# Altium PCB FPGA_board.PcbDoc (part 2 of 7)
Units mm, origin at the board's own origin, x right, y up, seen from the top; angles counter-clockwise.
Board outline 120 x 95 mm, 2 copper layers (Top Layer, Bottom Layer); 242 components, 219 nets, 1224 pads, 430 vias.
Unrouted connection lines stored in the file: 9.
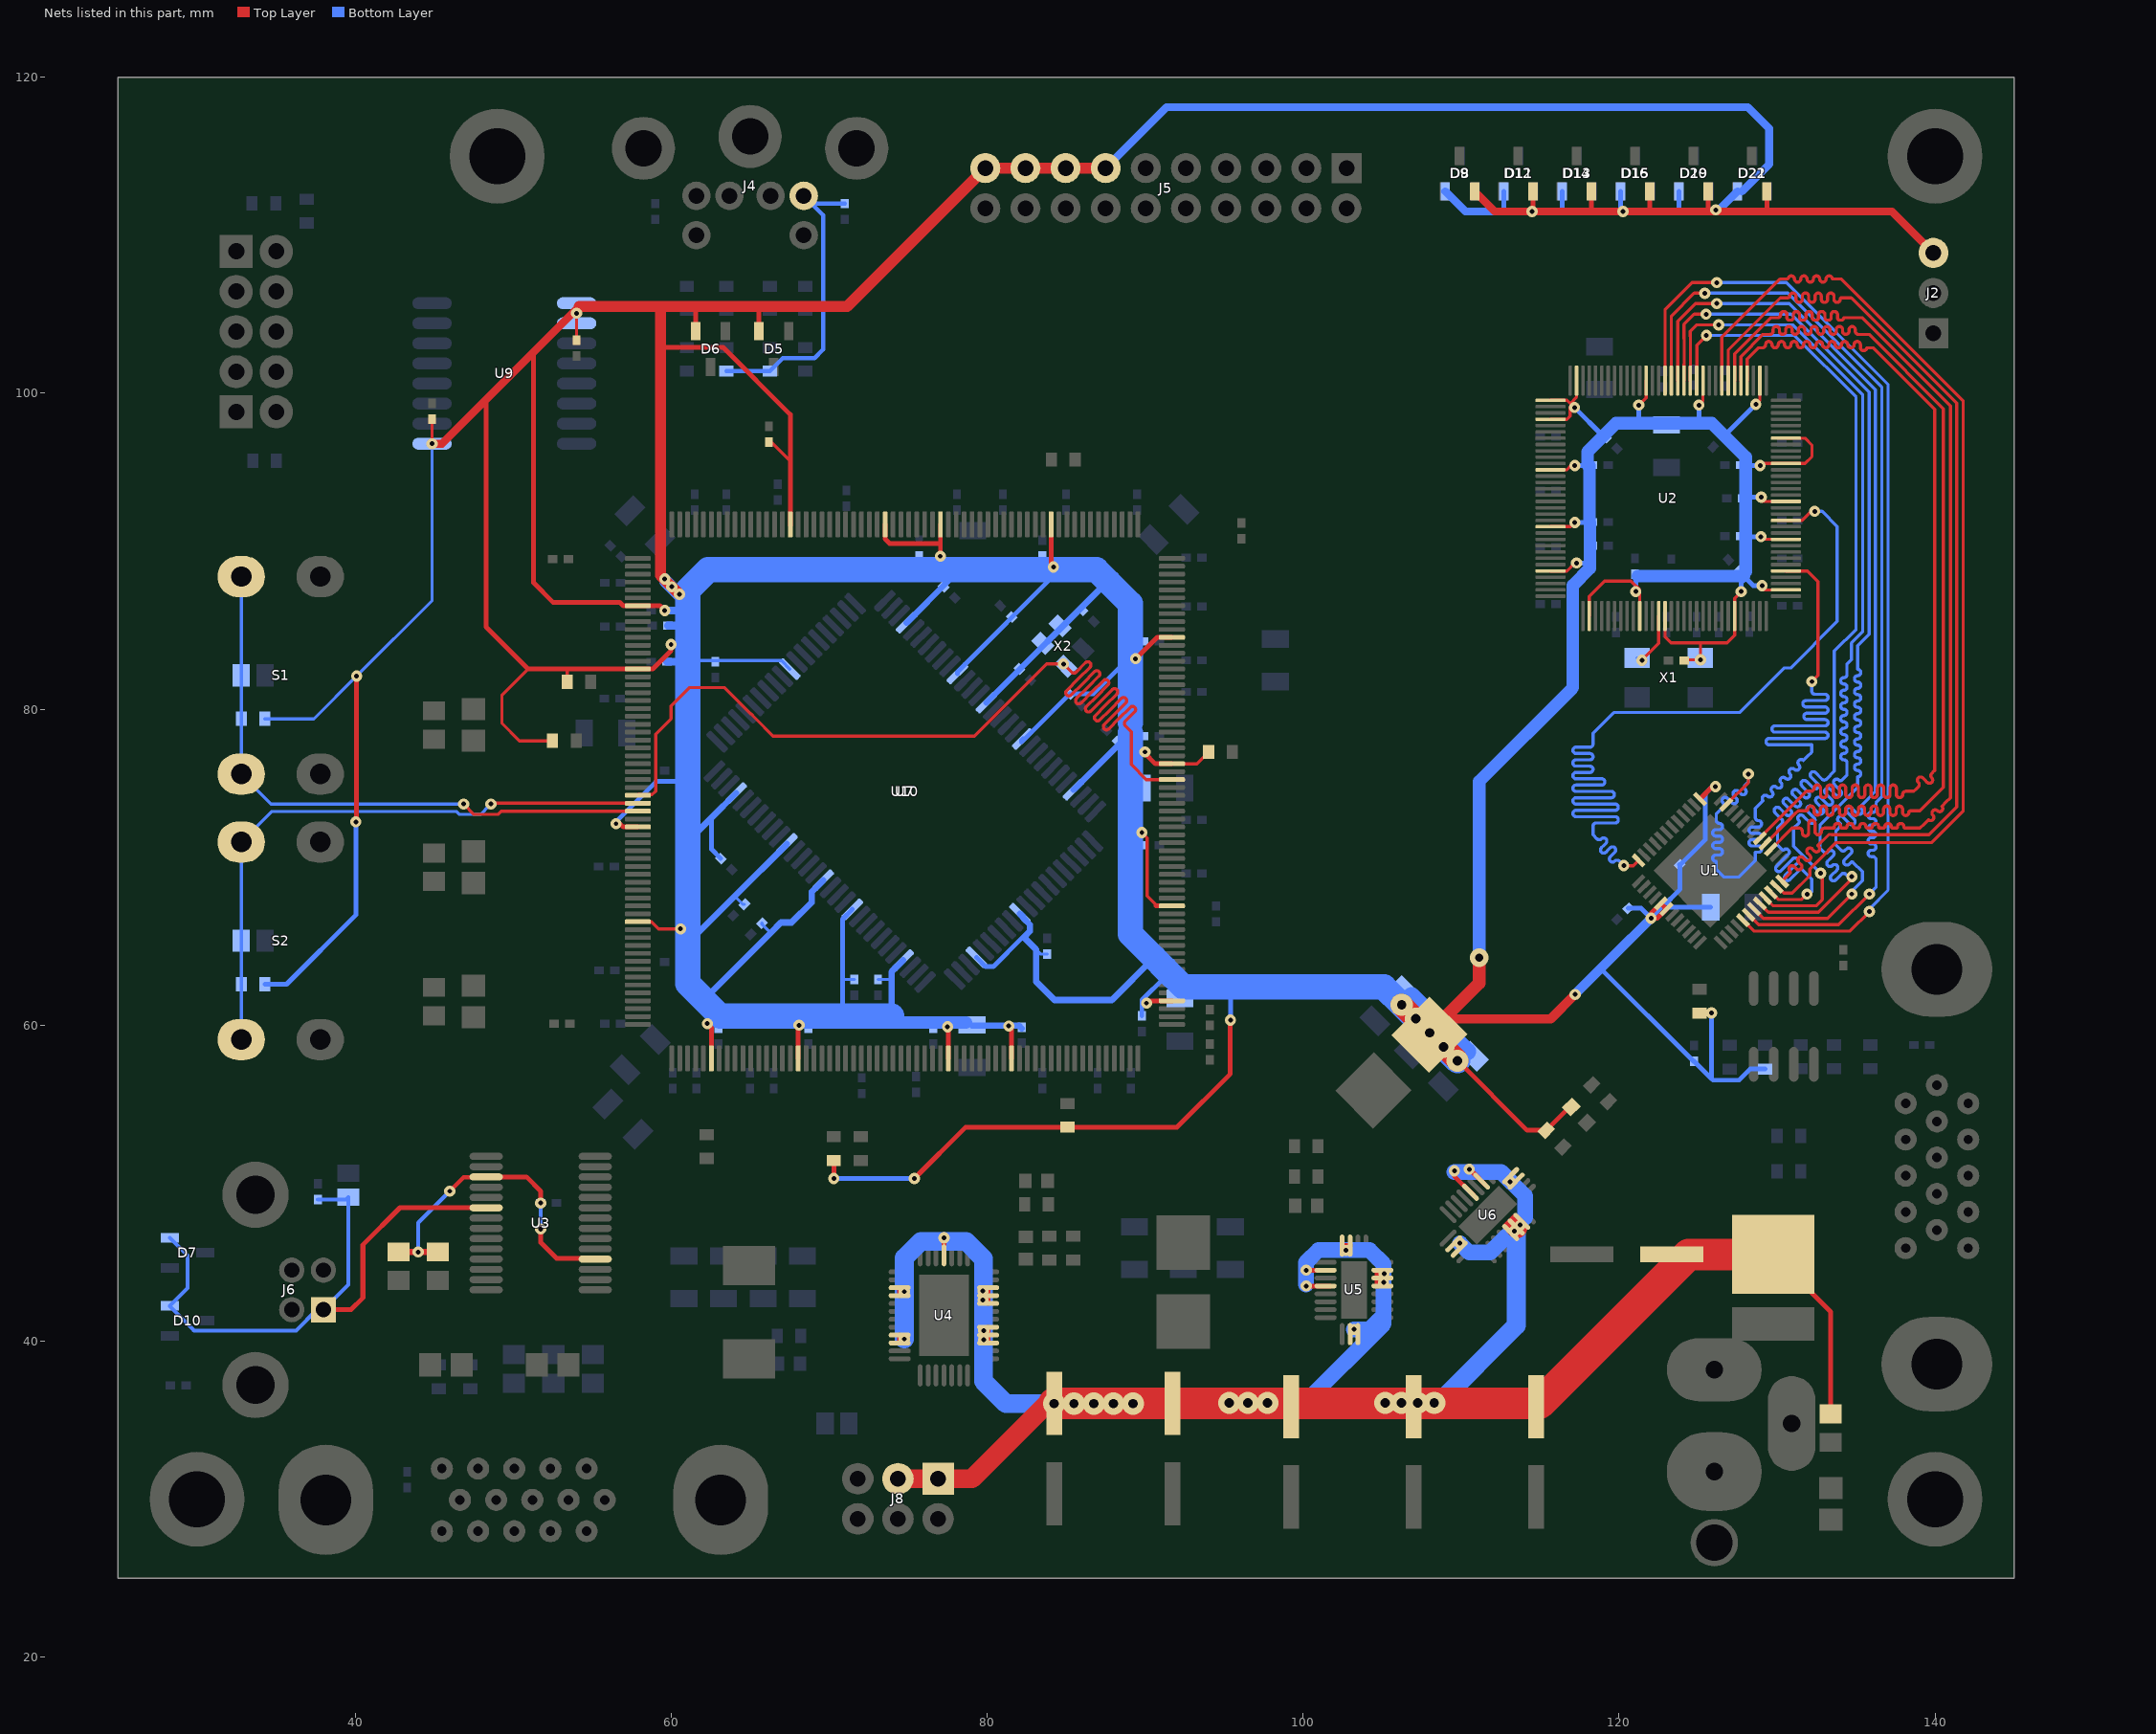
[diagram p2: the nets of this part, all layers, seen from the top]

## Via types
v1: diameter 0.71, hole 0.3, Top Layer to Bottom Layer, 393 vias
v2: diameter 1.4, hole 0.6, Top Layer to Bottom Layer, 32 vias
v3: diameter 2, hole 0.9, Top Layer to Bottom Layer, 4 vias
v4: diameter 1.2, hole 0.5, Top Layer to Bottom Layer, 1 vias

## Nets (pads, with @x,y where several pads share a name; then routed paths per layer and width w, separated by ;. In a path a pad name is that pad's centre, name@x,y a point inside that pad or via, vN(x,y) a via of type N, cw(c..) or ccw(c..) an arc to the next point about the centre after c; other vN are vias at no path point) (continued)
3.3V: C1.1 C2.2 C3.2 C6.2 C7.1 C8.1 C11.1 C12.1 C13.1 C14.1 C15.1 C16.1 C17.1 C18.1 C19.1 C20.1 C21.1 C65.1 C66.1 C67.1 C68.2 C69.2 C70.2 C71.2 C72.1 C73.1 C74.1 C75.1 C76.1 C77.1 C78.1 C79.1 C80.1 C81.1 C82.1 C83.1 C84.1 C85.1 C88.1 C94.1 C98.1 C102.1 C106.1 C107.1 C108.1 C111.1 C114.1 C117.1 C120.1 C123.1 C126.1 C129.1 C132.1 C135.1 C137.1 C139.1 D5.2 D6.2 D8.2 D9.2 D11.2 D12.2 D13.2 D14.2 D15.2 D16.2 D19.2 D20.2 D21.2 D22.2 J2.3 J5.7 J5.8 J5.9 J5.10 L3.2 R1.2 R7.1 R25.1 R26.1 R36.1 R41.1 R42.1 R43.1 R44.1 R45.1 U1.13 U1.29 U1.30 U2.4 U2.12 U2.16 U2.27 U2.34 U2.42 U2.48 U2.54 U2.58 U2.66 U2.75 U2.84 U2.95 U2.97 U2.100 U2.108 U2.117 U2.124 U7.7 U7.15 U7.35 U7.47 U7.66 U7.77 U7.96 U7.104 U7.124 U7.136 U7.154 U7.170 U7.192 U7.206 U7.213 U7.225 U9.1 U9.2 U9.9 U10.4 U10.11 U10.15 U10.20 U10.27 U10.41 U10.54 U10.61 U10.65 U10.70 U10.77 U10.91 U10.97 X1.4 X2.1 X2.4 | length 837.2
  Top Layer w0.2: v1@40.05,82.05 v1(40.1,82.1) ; v1(44.875,96.805) C70.2@44.875,98.35 ; 50.95,82.55 49.3,80.9 49.3,79.1 50.4,78 R43.1@52.5,78 ; R41.1@53.425,81.725 53.425,82.55 ; C71.2@54.025,103.35 v1(54.025,105.06) ; U7.47@57.9,66.55 58.755,66.55 59.205,66.1 v1(60.6,66.1) ; C132.1@66.2,96.9 66.225,96.925 66.325,96.925 67.55,95.7 ; v1(89.8,72.2) 90.137,71.863 90.137,68.188 90.704,67.621 90.704,67.55 ; U7.154@91.7,76.55 93.275,76.55 R42.1@94.025,77.3 ; U2.124@115.66,88.753 116.705,88.753 117.206,89.254 v1(117.31,89.254) ; U2.117@115.66,91.553 116.933,91.553 v1(117.203,91.823) ; U2.108@115.66,95.153 116.705,95.153 116.975,95.423 v1(117.203,95.423) ; U2.100@115.66,98.353 116.705,98.353 116.91,98.558 v1@116.91,99.099 ; U2.97@115.66,99.553 116.705,99.553 117.16,99.099 v1(117.178,99.099) ; 116.919,99.357 117.31,99.748 U2.95@117.31,100.803 ; U2.4@118.11,85.903 118.11,87.138 119.081,88.109 120.755,88.109 121.31,87.554 121.31,87.191 ; v1(121.053,87.448) 121.31,87.191 ; v1(121.253,99.249) 121.71,99.706 U2.84@121.71,100.803 ; U2.12@121.31,85.903 121.31,87.191 ; U2.16@122.91,85.903 122.91,84.59 123.288,84.212 125.162,84.212 ; C7.1@124.125,83.075 124.175,83.125 v1(125.15,83.125) 125.15,84.2 125.162,84.212 ; v1(125.053,99.249) 125.31,99.505 U2.75@125.31,100.803 ; v1(127.728,87.448) 127.31,87.03 U2.27@127.31,85.903 127.31,84.693 126.829,84.212 125.162,84.212 ; v1(128.655,99.298) 128.91,99.553 U2.66@128.91,100.803 ; v1(128.978,90.923) 129.148,90.753 U2.42@130.56,90.753 ; v1(129.003,93.423) 129.273,93.153 U2.48@130.56,93.153 v1@129.065,93.153 ; v1@129.065,87.553 U2.34@130.56,87.553 ; v1@129.065,95.553 U2.54@130.56,95.553 131.771,95.553 132.21,95.993 132.21,96.714 131.771,97.153 U2.58@130.56,97.153
  Top Layer w0.3: v1(40.05,72.875) 40.1,72.925 v1(40.1,82.1) ; 48.3,99.6 48.3,88.602 48.295,88.597 48.295,85.205 50.95,82.55 53.425,82.55 U7.15@57.95,82.55 ; 51.3,102.6 51.3,88 52.525,86.775 56.749,86.775 56.974,86.55 U7.7@57.9,86.55 59.297,86.55 v1(59.605,86.242) ; v1(56.52,72.755) 56.769,72.755 56.974,72.55 U7.35@57.9,72.55 ; U7.15@57.9,82.55 58.85,82.55 60,83.7 v1@60,84 ; 59.325,102.9 63.3,102.9 67.55,98.65 67.55,95.7 U7.225@67.55,91.625 ; 61.5,105.5 61.55,105.45 D6.2@61.55,103.925 ; v1(62.3,60.1) 62.55,59.85 U7.66@62.55,57.9 ; 63.4,105.5 63.45,105.45 ; D5.2@65.55,103.925 65.55,105.45 65.6,105.5 ; U7.77@68.05,57.9 68.05,59.95 v1(68.1,60) ; v1(70.3,50.3) R45.1@70.3,51.45 R45.1@70.45,51.45 ; U7.213@73.55,91.7 73.55,90.774 73.824,90.5 77.05,90.5 ; v1(75.4,50.3) 78.65,53.55 R44.1@85.1,53.55 92.025,53.55 95.4,56.925 95.4,60.323 v1(95.405,60.328) ; v1(77.043,89.685) 77.05,89.692 77.05,90.5 ; U7.206@77.05,91.7 77.05,90.5 ; v1(77.5,59.9) 77.55,59.95 U7.96@77.55,57.9 ; v1(81.375,59.953) 81.55,59.778 U7.104@81.55,57.9 ; U7.192@84.05,91.7 84.05,89.15 v1(84.2,89) ; v1(89.4,83.2) 89.424,83.2 90.774,84.55 U7.170@91.7,84.55 ; v1(90,77.3) 90,77.2 90.65,76.55 U7.154@91.7,76.55 ; v1@90.1,61.55 U7.124@91.7,61.55 ; 90.704,67.55 U7.136@91.7,67.55 ; v2(108.01,59.525) L3.2@108.885,60.4 ; v2@109.778,57.51 v2(109.778,57.758) 114.184,53.351 R36.1@115.387,53.351 116.863,54.828 C68.2@116.974,54.828 ; v1(114.5,111.5) 114.55,111.55 D12.2@114.55,112.775 ; 118.25,111.5 D14.2@118.25,112.775 ; D16.2@121.95,112.775 121.95,111.55 122,111.5 ; U1.13@125.121,74.318 v1@126.001,75.199 ; D20.2@125.65,112.775 125.65,111.6 ; 125.75,111.5 125.65,111.6 ; v1(126.125,111.6) 125.65,111.6 ; 129.25,111.5 129.35,111.6 D22.2@129.35,112.775 ; v1(122.026,66.774) 122.026,67.087 U1.29@122.646,67.707 U1.30@123,67.353 122.42,66.774 v1(122.026,66.774)
  Top Layer w0.5: v1(44.875,96.805) 45.505,96.805 48.3,99.6 51.3,102.6 54.2,105.5 ; 63.4,105.5 63.45,105.5 ; L3.2@107.993,59.402 108.102,59.402 L3.2@109.1,60.4 ; v2(108.01,59.525) L3.2@108.2,59.715 ; D9.2@110.85,112.775 112.125,111.5 v1(114.5,111.5) 118.25,111.5 v1(120.25,111.5) 122,111.5 125.75,111.5 129.25,111.5 137.28,111.5 J2.3@139.9,108.88
  Top Layer w0.6: L3.2@109.1,60.4 115.675,60.4 v1(117.225,61.95)
  Top Layer w0.7: 54.2,105.5 59.325,105.5 ; v1@60.487,87.312 59.325,88.475 59.325,102.9 59.325,105.5 ; 63.4,105.5 61.5,105.5 59.325,105.5 ; 63.45,105.5 65.6,105.5 71.14,105.5 J5.10@79.89,114.25 J5.9@82.43,114.25 J5.8@84.97,114.25 J5.7@87.51,114.25
  Top Layer w0.8: L3.2@108.885,60.4 111.15,62.665 v4(111.15,64.275)
  Top Layer w1.4: v2(106.242,61.293) v2(107.126,60.409) v2(108.01,59.525) 108.063,59.472 108.118,59.418 v2(108.894,58.641) v2(109.778,57.758)
  Bottom Layer w0.2: R25.1@34.3,79.396 37.396,79.396 v1(40.1,82.1) 44.875,86.875 v1(44.875,96.805) ; U9.2@54.025,104.425 v1(54.025,105.06) U9.1@54.025,105.695 ; 60.4,83.075 61.05,83.075 66.985,83.075 U10.41@67.517,82.543 ; 64.032,68.168 64.546,67.654 C74.1@64.654,67.654 ; C84.1@65.754,66.454 65.754,66.387 66.3,65.84 ; 70.855,62.9 C83.1@71.6,62.9 ; C75.1@73.1,62.9 73.95,62.9 ; 83.1,64.8 83.4,64.5 C76.1@83.8,64.5 ; U10.77@85.477,74.906 U10.77@85.477,75.033 ; v1(117.178,99.099) v1@117.254,99.099 ; 119.589,64.336 119.664,64.336 ; v1(125.15,83.125) X1.4@125.15,83.25 X1.4@125.15,83.57 ; v1@125.795,60.83 v1(125.85,60.775) ; v1(128.978,90.923) v1@128.978,91.187
  Bottom Layer w0.3: R26.1@34.3,62.596 35.671,62.596 40.05,66.975 v1(40.05,72.875) ; v1(56.52,72.755) 56.45,72.825 59.055,75.43 61.025,75.43 ; C123.1@59.5,86.2 59.563,86.2 v1(59.605,86.242) ; 60.6,64.85 60.713,64.85 ; 60.729,71.3 61.05,71.3 ; 62.556,73.128 62.556,71.144 C85.1@63.146,70.554 ; v1(70.3,50.3) v1(75.4,50.3) ; 70.85,60.925 71.2,60.575 ; 70.855,60.875 70.855,62.9 70.855,66.718 U10.11@71.477,67.34 ; v1(77.043,89.685) 77.043,89.657 v1@77.1,89.6 ; 77.6,88.171 77.6,88.825 ; U10.61@78.123,82.26 78.123,82.362 84.375,88.614 v1@84.375,88.825 ; U10.97@79.326,64.299 79.904,63.721 80.408,63.721 82.259,65.571 82.329,65.571 ; U10.70@82.304,78.123 U10.70@82.26,78.123 82.169,78.033 82.169,77.906 85.217,80.954 C78.1@85.246,80.954 85.246,80.985 86.735,80.985 v1@89.075,83.325 ; 87.578,88.038 87.712,88.038 ; 88.681,84.5 89.075,84.5 ; 89.075,77.3 v1(90,77.3) ; 89.075,78.504 89.075,79.15 ; C106.1@89.8,60.6 89.8,61.6 91.275,63.075 91.275,63.575 ; v1(95.405,60.328) 95.405,62.42 ; D11.2@112.7,112.775 112.7,111.55 112.75,111.5 ; 116.25,111.5 116.4,111.65 D13.2@116.4,112.775 ; v1(117.178,99.099) 118.972,97.304 C19.1@119.01,97.304 ; v1(117.203,91.823) 118.01,91.823 ; v1(117.203,95.423) 118.01,95.423 ; v1(117.225,61.95) v1@117.225,61.972 ; v1(117.31,89.254) 117.96,89.254 118.01,89.304 ; 118.841,63.589 124.705,57.725 C6.2@124.75,57.725 125.85,56.625 ; D15.2@120.1,112.775 120.1,111.65 v1(120.25,111.5) ; C2.2@120.579,67.404 121.396,67.404 v1(122.026,66.774) 122.728,67.475 ; v1(121.053,87.448) C13.1@121.053,88.429 ; 121.253,98.074 121.253,98.1 v1(121.253,99.249) ; 123.75,111.5 123.8,111.55 D19.2@123.8,112.775 ; 125.053,98.074 125.053,98.1 v1(125.053,99.249) ; C1.1@125.8,67.475 122.728,67.475 ; v1(125.85,60.775) 125.85,56.625 ; v1(126.1,75.1) 125.9,75.1 125.462,74.662 125.462,71.748 123.868,70.154 C3.2@123.829,70.154 123.86,70.122 123.86,68.608 122.728,67.475 ; v1(126.125,111.6) v1@126.225,111.5 ; 126.911,97.554 v1(128.655,99.298) ; D21.2@127.5,112.775 D21.2@127.775,112.775 ; v1(127.728,87.448) 127.728,88.023 127.975,88.269 C14.1@127.975,88.675 ; 127.889,88.425 128.491,87.823 v1(129.053,87.823) ; 128.01,90.923 v1(128.978,90.923) ; C16.1@128.01,93.423 v1(129.003,93.423) ; 128.01,95.423 v1(128.928,95.423) ; R7.1@129.25,57.225 128.295,57.225 127.595,56.525 125.95,56.525 125.85,56.625
  Bottom Layer w0.4: 60.713,64.85 61.05,65.187 64.032,68.168 U10.20@67.34,71.477 ; 60.729,71.3 61.05,71.621 61.564,72.136 62.556,73.128 ; 62.275,61.815 66.3,65.84 66.96,66.5 67.625,66.5 68.9,67.775 68.9,68.44 U10.15@69.638,69.178 ; 62.564,73.136 U10.27@64.123,74.694 ; 73.95,60.525 73.95,62.9 73.95,63.379 U10.4@74.694,64.123 ; U10.54@74.906,85.477 77.6,88.171 ; C107.1@79.05,59.975 82.025,59.975 C102.1@82.2,59.8 ; U10.65@79.962,80.421 87.578,88.038 ; U10.91@82.083,67.057 82.3,66.84 82.3,66.784 82.712,66.372 82.712,65.953 82.329,65.571 83.1,64.8 83.1,62.775 84.275,61.6 87.9,61.6 90.575,64.275 ; U10.77@85.477,74.906 89.075,78.504
  Bottom Layer w0.5: C126.1@59.75,83 60.975,83 61.05,83.075 ; C123.1@59.75,86.25 61.05,86.25 ; C88.1@59.8,85.3 61.025,85.3 61.05,85.325 ; J5.7@87.51,114.25 91.36,118.1 128.15,118.1 129.5,116.75 129.5,114.5 D21.2@127.775,112.775 ; D8.2@109,112.775 110.275,111.5 112.75,111.5 v1(114.5,111.5) 116.25,111.5 v1(120.25,111.5) 123.75,111.5 126.225,111.5 D21.2@127.5,112.775 ; 118.01,95.423 118.01,95.454 ; v1(125.053,99.249) v1@125.065,99.249
  Bottom Layer w0.6: v1@117.225,61.972 119.253,64 ; 118.841,63.589 119.589,64.336 v1(122.026,66.774)
  Bottom Layer w0.7: v1@60.6,87.075 59.6,88.075 v1(59.6,88.25) v1@60.6,87.25
  Bottom Layer w0.8: 74.075,60.175 C107.1@78.675,60.175 ; v4@111.15,64.05 111.15,75.436 117.009,81.295 117.009,81.309 117.075,81.375 117.075,87.85 118.15,88.925 118.15,89.55 ; 118.01,95.454 118.01,96.304 119.01,97.304 119.806,98.1 121.253,98.1 125.053,98.1 125.871,98.1 C18.1@126.663,97.308 128.01,95.961 128.01,95.423 128.01,93.423 128.01,90.923 128.01,88.71 C14.1@127.975,88.675 ; C20.1@118.135,91.823 C21.1@118.135,95.423 ; 118.16,89.304 C20.1@118.16,91.823 ; C13.1@121.2,88.425 127.889,88.425
  Bottom Layer w1.1: C66.1@106.861,61.876 C67.1@108.629,60.109 C65.1@110.397,58.341
  Bottom Layer w1.6: 71.146,60.575 63.125,60.575 61.05,62.65 61.05,65.187 61.05,71.3 61.05,71.621 61.05,83.075 61.05,85.325 61.05,86.25 61.05,87.525 62.35,88.825 77.6,88.825 84.375,88.825 86.925,88.825 87.712,88.038 89.075,86.675 89.075,84.5 89.075,83.325 89.075,79.15 ; 71.2,60.575 73.95,60.575 ; 89.075,78.504 89.075,77.3 89.075,65.775 90.575,64.275 91.275,63.575 92.43,62.42 95.405,62.42 105.115,62.42 v2(106.242,61.293) v2(107.126,60.409) v2(108.01,59.525) v2(109.778,57.758)
  other v1: 90.1,61.4 60,84.1 60.525,87.275 60.05,87.75
3.3V_USB: C46.1 R27.2 R28.2 U3.4 U3.17 | length 20.8
  Top Layer w0.254: v1(46,49.5) 46.875,50.375 48.275,50.375 U3.17@48.3,50.4
  Top Layer w0.3: U3.17@48.3,50.4 50.85,50.4 51.75,49.5 v1(51.75,48.75) ; v1(51.75,47.1) 51.75,46.25 52.75,45.25 55.15,45.25 U3.4@55.2,45.2
  Top Layer w0.4: R27.2@42.75,45.65 v1(44,45.65) R28.2@45.25,45.65
  Bottom Layer w0.254: v1(44,45.65) 44,47.5 v1(46,49.5) ; v1(51.75,47.1) v1(51.75,48.75)
5V: C39.2 J4.4 R14.2 R15.2 | length 18.9
  Bottom Layer w0.254: R15.2@63.5,101.4 R14.2@66.25,101.4 67.073,102.223 69.085,102.223 69.627,102.765 69.627,111.273 J4.4@68.9,112 ; J4.4@68.525,112.375 J4.4@68.9,112 ; C39.2@71,112 J4.4@68.9,112
5V_IN: C48.1 C49.1 C55.1 C56.1 C59.1 C64.1 D23.2 J8.1 J8.2 R30.1 U4.3 U4.4 U4.9 U4.10 U4.22 U4.23 U4.24 U4.27 U4.28 U4.29 U4.35 U5.2 U5.4 U5.10 U5.11 U5.17 U5.18 U5.19 U5.23 U5.24 U6.2 U6.4 U6.10 U6.11 U6.17 U6.18 U6.19 U6.23 U6.24 | length 174.8
  Top Layer w0.3: U4.10@74.471,39.891 U4.9@74.471,40.391 ; U4.4@74.471,42.891 U4.3@74.471,43.391 ; U4.35@77.271,45.441 77.271,46.546 v1(77.275,46.55) ; U4.22@80.071,39.891 U4.23@80.071,40.391 U4.24@80.071,40.891 ; U4.27@80.071,42.391 U4.28@80.071,42.891 U4.29@80.071,43.391 ; v1(100.2,43.5) U5.4@101.425,43.5 U5.4@101.725,43.5 ; v1(100.2,44.5) U5.2@101.425,44.5 ; U5.24@102.475,46.05 U5.23@102.975,46.05 ; v1(109.577,50.788) 109.577,50.443 U6.4@110.594,49.427 U6.4@110.806,49.214 ; v1@110.77,50.664 U6.2@111.513,49.921 ; D23.2@129.75,45.5 133.4,41.85 R30.1@133.4,35.4
  Top Layer w0.4: U5.17@104.725,43.55 U5.19@104.725,44.45 ; U6.17@112.821,47.27 U6.19@113.457,47.906
  Top Layer w1.2: J8.2@74.36,31.3 J8.1@76.9,31.3 79.05,31.3 83.806,36.056 v2(84.25,36.056) ; C48.1@114.75,35.85 C48.1@114.956,36.056
  Top Layer w1.3: U6.18@113.457,47.27 U6.18@113.546,47.181
  Top Layer w2: v2(85.5,36.056) v2(84.25,36.056) ; v2(86.75,36.056) v2(84.25,36.056) ; v2(88,36.056) v2(84.25,36.056) ; D23.2@129.75,45.5 124.4,45.5 114.956,36.056 C64.1@91.75,36.056 v2(89.25,36.056) v2(84.25,36.056)
  Bottom Layer w1: v2(95.325,36.1) 100.1,36.1 105.1,41.1 105.1,41.65 ; v1@100.2,43.6 100.2,45 100.975,45.775 104.2,45.775 105.1,44.875 105.1,41.65 ; v1(103.225,40.75) 104.2,40.75 105.1,41.65 ; v1@109.577,50.717 110.52,50.717 112.533,50.717 114.053,49.197 114.053,47.83 111.837,45.614 110.517,45.614 v1@109.939,46.192
  Bottom Layer w1.2: v1(74.771,40.141) v1(74.771,43.141) 74.771,45.271 75.825,46.325 78.675,46.325 79.771,45.229 79.771,43.175 v1@79.771,40.141 ; v1(79.778,40.099) 79.778,37.472 81.194,36.056 v2(84.25,36.056) v2(85.5,36.056) v2(86.75,36.056) v2(88,36.056) v2(89.25,36.056) ; v2(105.2,36.1) 108.6,36.1 113.5,41 v1@113.5,47
  other v1: 79.796,40.682 79.743,42.609 79.743,43.175 105.1,43.725 105.125,44.275 102.725,45.75 109.922,46.209 113.376,46.977 113.751,47.351 113.104,50.098 110.52,50.889
  other v2: 96.5,36.1 97.75,36.1 106.233,36.1 107.267,36.1 108.3,36.1
5V_USB: C44.1 C45.2 D7.2 D10.2 J6.1 U3.20 | length 40.9
  Top Layer w0.305: J6.1@38,42 39.75,42 40.5,42.75 40.5,46.1 42.85,48.45 U3.20@48.3,48.45
  Bottom Layer w0.254: D7.2@28.275,46.55 29.4,45.425 29.4,43.375 D10.2@28.275,42.25 28.275,42.213 29.815,40.673 36.267,40.673 37.594,42 J6.1@38,42 39.575,43.575 C45.2@39.575,49.125 39.425,48.975 C44.1@37.65,48.975
10MHZ: U2.15 X1.3 | length 3.6
  Top Layer w0.2: v1(121.45,83.1) 122.51,84.16 U2.15@122.51,85.903
  Bottom Layer w0.2: X1.3@121.15,83.25 121.3,83.1 v1(121.45,83.1)
50MHZ: U7.31 U7.152 X2.3 | length 71
  Top Layer w0.2: U7.31@57.9,74.55 57.95,74.6 58.805,74.6 59.025,74.82 59.025,78.425 60,79.4 60,80.2 61.175,81.375 63.376,81.375 65.032,79.719 65.049,79.719 65.316,79.452 65.316,79.435 66.451,78.3 79.2,78.3 83.769,82.869 v1(84.835,82.869) 85.354,82.35 ccw(c85.495,82.491) 85.637,82.35 86.233,82.946 cw(c86.375,82.805) 86.516,82.946 cw(c86.375,82.805) 86.516,82.663 85.778,81.926 85.041,81.188 ccw(c85.182,81.047) 85.041,80.905 ccw(c85.182,81.047) 85.323,80.905 86.061,81.643 86.799,82.381 cw(c86.94,82.239) 87.082,82.381 cw(c86.94,82.239) 87.082,82.098 86.344,81.36 85.664,80.68 ccw(c85.805,80.538) 85.664,80.397 ccw(c85.805,80.538) 85.947,80.397 86.627,81.077 87.364,81.815 cw(c87.506,81.673) 87.647,81.815 cw(c87.506,81.673) 87.647,81.532 86.91,80.794 86.285,80.17 ccw(c86.426,80.028) 86.285,79.887 ccw(c86.426,80.028) 86.568,79.887 87.192,80.512 87.93,81.249 cw(c88.072,81.108) 88.213,81.249 cw(c88.072,81.108) 88.213,80.966 87.475,80.229 86.851,79.604 ccw(c86.992,79.463) 86.851,79.321 ccw(c86.992,79.463) 87.134,79.321 87.758,79.946 88.496,80.684 cw(c88.637,80.542) 88.779,80.684 cw(c88.637,80.542) 88.779,80.401 88.041,79.663 87.416,79.038 ccw(c87.558,78.897) 87.416,78.756 ccw(c87.558,78.897) 87.699,78.756 88.324,79.38 89.061,80.118 cw(c89.203,79.976) 89.344,80.118 cw(c89.203,79.976) 89.344,79.835 88.748,79.239 ccw(c88.89,79.097) 88.748,78.956 89.127,78.577 89.127,78.377 ; 89.127,78.575 89.127,76.498 90.075,75.55 U7.152@91.7,75.55
BTN1: C42.2 R26.2 S2.2 U7.32 | length 38.9
  Top Layer w0.203: v1@48.5,73.9 48.65,74.05 U7.32@57.9,74.05
  Bottom Layer w0.203: S2.2@32.688,71.734 S2.2@32.8,71.846 ; S2.2@32.8,59.096 S2.2@32.8,71.596 34.736,73.532 46.415,73.532 46.603,73.344 47.944,73.344 v1@48.5,73.9
  other v1: 48.6,74
BTN2: C41.2 R25.2 S1.2 U7.33 | length 38.7
  Top Layer w0.203: v1(46.875,74) 47.532,73.344 49.043,73.344 49.25,73.55 U7.33@57.9,73.55
  Bottom Layer w0.203: S1.2@32.8,88.396 S1.2@32.8,75.896 34.696,74 v1(46.875,74)
FB_BLANK: U1.11 U2.37 | length 63.5
  Top Layer w0.2: U1.11@126.783,73.965 128.185,75.367 v1(128.185,75.9) ; U2.37@130.56,88.753 131.915,88.753 132.59,88.079 132.59,82.14 v1(132.2,81.75)
  Bottom Layer w0.2: v1(128.185,75.9) 128.185,75.41 127.988,75.212 ccw(c128.129,75.071) 127.988,74.93 cw(c127.846,74.788) 127.987,74.647 cw(c127.846,74.788) 127.705,74.647 127.563,74.788 127.552,74.8 ccw(c127.41,74.658) 127.269,74.8 ccw(c127.41,74.658) 127.269,74.517 127.28,74.505 127.422,74.364 cw(c127.28,74.223) 127.422,74.081 cw(c127.28,74.223) 127.139,74.081 126.998,74.223 126.856,74.364 ccw(c126.715,74.223) 126.573,74.364 ccw(c126.715,74.223) 126.573,74.081 cw(c126.432,73.94) 126.573,73.798 126.432,73.657 126.15,73.375 126.15,73.175 126.15,72.975 ccw(c126.35,72.975) 126.35,72.775 cw(c126.35,72.575) 126.55,72.575 cw(c126.35,72.575) 126.35,72.375 126.15,72.375 126.125,72.375 ccw(c126.125,72.175) 125.925,72.175 ccw(c126.125,72.175) 126.125,71.975 126.15,71.975 126.35,71.975 cw(c126.35,71.775) 126.55,71.775 cw(c126.35,71.775) 126.35,71.575 126.15,71.575 126.125,71.575 ccw(c126.125,71.375) 125.925,71.375 ccw(c126.125,71.375) 126.125,71.175 126.15,71.175 126.35,71.175 cw(c126.35,70.975) 126.55,70.975 cw(c126.35,70.975) 126.35,70.775 126.15,70.775 126.125,70.775 ccw(c126.125,70.575) 125.925,70.575 ccw(c126.125,70.575) 126.125,70.375 cw(c126.125,70.35) 126.15,70.35 126.15,70.275 126.15,69.875 126.65,69.375 127.575,69.375 128.625,70.425 128.625,70.925 cw(c128.65,70.925) 128.65,70.95 128.825,70.95 ccw(c128.825,71.15) 129.025,71.15 ccw(c128.825,71.15) 128.825,71.35 128.625,71.35 128.425,71.35 cw(c128.425,71.55) 128.225,71.55 cw(c128.425,71.55) 128.425,71.75 128.625,71.75 128.825,71.75 ccw(c128.825,71.95) 129.025,71.95 ccw(c128.825,71.95) 128.825,72.15 128.625,72.15 128.425,72.15 cw(c128.425,72.35) 128.225,72.35 cw(c128.425,72.35) 128.425,72.55 128.625,72.55 128.825,72.55 ccw(c128.825,72.75) 129.025,72.75 ccw(c128.825,72.75) 128.825,72.95 cw(c128.825,73.15) 128.625,73.15 128.625,73.725 128.975,74.075 129.116,74.216 cw(c129.258,74.358) 129.116,74.499 cw(c129.258,74.358) 129.399,74.499 ccw(c129.541,74.641) 129.682,74.499 ccw(c129.541,74.641) 129.682,74.782 cw(c129.824,74.924) 129.682,75.065 cw(c129.824,74.924) 129.965,75.065 ccw(c130.106,75.206) 130.248,75.065 ccw(c130.106,75.206) 130.248,75.348 cw(c130.389,75.489) 130.248,75.631 cw(c130.389,75.489) 130.531,75.631 ccw(c130.672,75.772) 130.813,75.631 ccw(c130.672,75.772) 130.813,75.913 cw(c130.955,76.055) 130.813,76.196 cw(c130.955,76.055) 131.096,76.196 ccw(c131.238,76.338) 131.379,76.196 ccw(c131.238,76.338) 131.379,76.479 cw(c131.521,76.621) 131.379,76.762 cw(c131.521,76.621) 131.662,76.762 131.945,77.045 132.15,77.25 132.2,77.3 132.2,77.725 ccw(c132.175,77.725) 132.175,77.75 129.499,77.75 cw(c129.499,77.95) 129.299,77.95 cw(c129.499,77.95) 129.499,78.15 132.2,78.15 133.025,78.15 ccw(c133.025,78.35) 133.225,78.35 ccw(c133.025,78.35) 133.025,78.55 132.2,78.55 129.873,78.55 cw(c129.873,78.75) 129.673,78.75 cw(c129.873,78.75) 129.873,78.95 132.2,78.95 133.025,78.95 ccw(c133.025,79.15) 133.225,79.15 ccw(c133.025,79.15) 133.025,79.35 132.2,79.35 131.892,79.35 cw(c131.892,79.55) 131.692,79.55 cw(c131.892,79.55) 131.892,79.75 132.2,79.75 133.025,79.75 ccw(c133.025,79.95) 133.225,79.95 ccw(c133.025,79.95) 133.025,80.15 132.2,80.15 131.83,80.15 cw(c131.83,80.35) 131.63,80.35 cw(c131.83,80.35) 131.83,80.55 132.2,80.55 133.025,80.55 ccw(c133.025,80.75) 133.225,80.75 ccw(c133.025,80.75) 133.025,80.95 132.4,80.95 cw(c132.4,81.15) 132.2,81.15 v1(132.2,81.75)
FB_CLK: U1.24 U2.45 | length 65.1
  Top Layer w0.2: v1(120.3,70.1) 120.903,70.1 U1.24@121.232,70.429 ; U2.45@130.56,91.953 131.603,91.953 v1@132.175,92.525
  Bottom Layer w0.2: 118.35,72.4 118.35,72.6 ; 118.35,78 118.35,77.8 ; 118.388,78.513 119.668,79.793 127.625,79.793 128.155,80.324 130.442,82.61 130.855,82.61 133.8,85.555 133.8,91.575 132.85,92.525 v1@132.175,92.525 ; 118.491,78.616 118.35,78.475 118.35,78.4 118.35,77.8 ; v1(120.3,70.1) 120.156,70.244 120.014,70.386 ccw(c119.873,70.244) 119.731,70.386 cw(c119.59,70.527) 119.449,70.386 cw(c119.59,70.527) 119.449,70.669 119.59,70.81 119.731,70.951 ccw(c119.59,71.093) 119.731,71.234 ccw(c119.59,71.093) 119.449,71.234 119.307,71.093 119.166,70.951 cw(c119.024,71.093) 118.883,70.951 cw(c119.024,71.093) 118.883,71.234 119.024,71.376 119.166,71.517 ccw(c119.024,71.659) 119.166,71.8 ccw(c119.024,71.659) 118.883,71.8 cw(c118.741,71.941) 118.6,71.8 118.35,72.05 118.35,72.2 118.35,72.6 ; 118.35,72.6 cw(c118.55,72.6) 118.55,72.8 119.75,72.8 ccw(c119.75,73) 119.95,73 ccw(c119.75,73) 119.75,73.2 118.35,73.2 117.275,73.2 cw(c117.275,73.4) 117.075,73.4 cw(c117.275,73.4) 117.275,73.6 118.35,73.6 119.75,73.6 ccw(c119.75,73.8) 119.95,73.8 ccw(c119.75,73.8) 119.75,74 118.35,74 117.275,74 cw(c117.275,74.2) 117.075,74.2 cw(c117.275,74.2) 117.275,74.4 118.35,74.4 119.503,74.4 ccw(c119.503,74.6) 119.703,74.6 ccw(c119.503,74.6) 119.503,74.8 118.35,74.8 117.275,74.8 cw(c117.275,75) 117.075,75 cw(c117.275,75) 117.275,75.2 118.35,75.2 118.895,75.2 ccw(c118.895,75.4) 119.095,75.4 ccw(c118.895,75.4) 118.895,75.6 118.35,75.6 117.275,75.6 cw(c117.275,75.8) 117.075,75.8 cw(c117.275,75.8) 117.275,76 118.15,76 ccw(c118.15,76.2) 118.35,76.2 ccw(c118.15,76.2) 118.15,76.4 117.275,76.4 cw(c117.275,76.6) 117.075,76.6 cw(c117.275,76.6) 117.275,76.8 118.15,76.8 ccw(c118.15,77) 118.35,77 ccw(c118.15,77) 118.15,77.2 117.275,77.2 cw(c117.275,77.4) 117.075,77.4 cw(c117.275,77.4) 117.275,77.6 118.15,77.6 ccw(c118.15,77.8) 118.35,77.8
  other v1: 132.381,92.525
FB_D0: U1.41 U2.81 | length 64.6
  Top Layer w0.2: U2.81@122.91,100.803 122.91,102.334 122.911,102.335 122.911,102.951 122.91,102.952 122.91,105.285 124.624,106.999 v1(126.185,106.999) ; U1.41@127.843,66.646 128.528,65.961 134.611,65.961 v1(135.845,67.195)
  Bottom Layer w0.2: v1(126.185,106.999) 130.585,106.999 137.025,100.56 137.025,68.559 135.845,67.379 v1(135.845,67.195)
FB_D1: U1.42 U2.80 | length 64.2
  Top Layer w0.2: U2.80@123.31,100.803 123.31,102.168 123.311,102.169 123.311,103.117 123.31,103.118 123.31,104.885 124.755,106.33 v1(125.431,106.33) ; U1.42@128.197,67 128.835,66.361 133.901,66.361 v1(135.845,68.305)
  Bottom Layer w0.2: v1(125.431,106.33) 125.436,106.335 130.684,106.335 136.625,100.394 136.625,74.439 136.261,74.075 136.261,73.875 136.261,73.675 cw(c136.061,73.675) 136.061,73.475 135.961,73.475 ccw(c135.961,73.275) 135.761,73.275 ccw(c135.961,73.275) 135.961,73.075 136.061,73.075 cw(c136.061,72.875) 136.261,72.875 cw(c136.061,72.875) 136.061,72.675 135.961,72.675 ccw(c135.961,72.475) 135.761,72.475 ccw(c135.961,72.475) 135.961,72.275 136.061,72.275 cw(c136.061,72.075) 136.261,72.075 cw(c136.061,72.075) 136.061,71.875 135.961,71.875 ccw(c135.961,71.675) 135.761,71.675 ccw(c135.961,71.675) 135.961,71.475 136.061,71.475 cw(c136.061,71.275) 136.261,71.275 cw(c136.061,71.275) 136.061,71.075 135.961,71.075 ccw(c135.961,70.875) 135.761,70.875 ccw(c135.961,70.875) 135.961,70.675 136.061,70.675 cw(c136.061,70.475) 136.261,70.475 136.261,70.275 136.261,70.075 136.261,68.721 v1(135.845,68.305)
FB_D2: U1.43 U2.79 | length 64.3
  Top Layer w0.2: U2.79@123.71,100.803 123.71,102.002 123.711,102.003 123.711,103.283 123.71,103.284 123.71,104.56 124.825,105.675 126.176,105.675 v1(126.181,105.68) ; U1.43@128.55,67.353 129.142,66.761 133.191,66.761 v1(134.735,68.305)
  Bottom Layer w0.2: v1(126.181,105.68) 130.773,105.68 136.225,100.228 136.225,74.8 135.375,73.95 135.351,73.926 ccw(c135.469,73.809) 135.351,73.691 cw(c135.21,73.549) 135.351,73.408 cw(c135.21,73.549) 135.069,73.408 134.951,73.526 134.739,73.738 ccw(c134.597,73.596) 134.456,73.738 ccw(c134.597,73.596) 134.456,73.455 134.668,73.243 134.88,73.031 cw(c134.739,72.889) 134.88,72.748 cw(c134.739,72.889) 134.597,72.748 134.385,72.96 134.173,73.172 ccw(c134.031,73.031) 133.89,73.172 ccw(c134.031,73.031) 133.89,72.889 133.961,72.819 cw(c133.819,72.677) 133.961,72.536 133.85,72.425 133.725,72.3 133.725,71.4 134.037,71.087 ccw(c134.179,71.229) 134.32,71.088 134.391,71.158 cw(c134.532,71.017) 134.674,71.158 cw(c134.532,71.017) 134.674,70.875 134.462,70.663 134.273,70.475 ccw(c134.415,70.334) 134.274,70.192 ccw(c134.415,70.334) 134.556,70.192 134.677,70.312 cw(c134.745,70.245) 134.812,70.313 135.398,69.727 135.398,69.152 134.735,68.489 v1(134.735,68.305)
FB_D3: U1.44 U2.78 | length 64.2
  Top Layer w0.2: U2.78@124.11,100.803 124.11,101.837 124.12,101.847 124.12,103.439 124.11,103.449 124.11,104.36 124.755,105.005 v1(125.506,105.005) ; U1.44@128.904,67.707 129.449,67.161 132.628,67.161 134.735,69.268 v1(134.735,69.415)
  Bottom Layer w0.2: v1(125.506,105.005) 130.883,105.005 135.825,100.063 135.825,84.752 135.1,84.027 135.1,82.725 135.1,82.525 cw(c135.1,82.325) 135.3,82.325 cw(c135.1,82.325) 135.1,82.125 ccw(c135.1,81.925) 134.9,81.925 ccw(c135.1,81.925) 135.1,81.725 cw(c135.1,81.525) 135.3,81.525 cw(c135.1,81.525) 135.1,81.325 ccw(c135.1,81.125) 134.9,81.125 ccw(c135.1,81.125) 135.1,80.925 cw(c135.1,80.725) 135.3,80.725 cw(c135.1,80.725) 135.1,80.525 ccw(c135.1,80.325) 134.9,80.325 ccw(c135.1,80.325) 135.1,80.125 cw(c135.1,79.925) 135.3,79.925 cw(c135.1,79.925) 135.1,79.725 ccw(c135.1,79.525) 134.9,79.525 ccw(c135.1,79.525) 135.1,79.325 cw(c135.1,79.125) 135.3,79.125 cw(c135.1,79.125) 135.1,78.925 ccw(c135.1,78.725) 134.9,78.725 ccw(c135.1,78.725) 135.1,78.525 cw(c135.1,78.325) 135.3,78.325 cw(c135.1,78.325) 135.1,78.125 ccw(c135.1,77.925) 134.9,77.925 ccw(c135.1,77.925) 135.1,77.725 cw(c135.1,77.525) 135.3,77.525 cw(c135.1,77.525) 135.1,77.325 ccw(c135.1,77.125) 134.9,77.125 ccw(c135.1,77.125) 135.1,76.925 cw(c135.1,76.725) 135.3,76.725 cw(c135.1,76.725) 135.1,76.525 ccw(c135.1,76.325) 134.9,76.325 ccw(c135.1,76.325) 135.1,76.125 cw(c135.1,75.925) 135.3,75.925 cw(c135.1,75.925) 135.1,75.725 135.1,75.4 135.1,75.064 132.725,72.689 132.725,71.175 132.938,70.963 ccw(c133.079,71.104) 133.22,70.963 133.267,71.009 cw(c133.409,70.868) 133.55,71.009 cw(c133.409,70.868) 133.55,70.726 133.362,70.538 133.209,70.385 ccw(c133.35,70.244) 133.209,70.102 ccw(c133.35,70.244) 133.492,70.102 133.503,70.114 cw(c133.645,69.973) 133.786,70.114 cw(c133.645,69.973) 133.786,69.831 133.432,69.478 ccw(c133.574,69.336) 133.432,69.195 ccw(c133.574,69.336) 133.715,69.195 134.096,69.575 cw(c134.21,69.46) 134.325,69.575 134.485,69.415 v1(134.735,69.415)
FB_D4: U1.45 U2.77 | length 64.4
  Top Layer w0.2: U2.77@124.51,100.803 124.51,101.671 124.52,101.681 124.52,101.837 124.52,103.605 124.51,103.615 124.51,103.91 124.93,104.33 v1(126.306,104.33) ; U1.45@129.258,68.06 129.756,67.561 132.463,67.561 132.855,67.954 132.855,69.53 v1(132.757,69.628)
  Bottom Layer w0.2: v1(126.306,104.33) 130.992,104.33 135.425,99.897 135.425,84.917 134.7,84.192 134.7,83.139 134.426,82.864 134.426,82.2 cw(c134.226,82.2) 134.226,82 ccw(c134.225,81.8) 134.025,81.8 ccw(c134.225,81.8) 134.225,81.6 cw(c134.226,81.4) 134.426,81.4 cw(c134.226,81.4) 134.226,81.2 ccw(c134.225,81) 134.025,81 ccw(c134.225,81) 134.225,80.8 cw(c134.226,80.6) 134.426,80.6 cw(c134.226,80.6) 134.226,80.4 ccw(c134.225,80.2) 134.025,80.2 ccw(c134.225,80.2) 134.225,80 cw(c134.226,79.8) 134.426,79.8 cw(c134.226,79.8) 134.226,79.6 ccw(c134.225,79.4) 134.025,79.4 ccw(c134.225,79.4) 134.225,79.2 cw(c134.226,79) 134.426,79 cw(c134.226,79) 134.226,78.8 ccw(c134.225,78.6) 134.025,78.6 ccw(c134.225,78.6) 134.225,78.4 cw(c134.226,78.2) 134.426,78.2 cw(c134.226,78.2) 134.226,78 ccw(c134.225,77.8) 134.025,77.8 ccw(c134.225,77.8) 134.225,77.6 cw(c134.226,77.4) 134.426,77.4 cw(c134.226,77.4) 134.226,77.2 ccw(c134.225,77) 134.025,77 ccw(c134.225,77) 134.225,76.8 cw(c134.226,76.6) 134.426,76.6 134.426,75.851 134.09,75.515 cw(c134.001,75.603) 133.913,75.515 ccw(c133.772,75.373) 133.63,75.515 ccw(c133.772,75.373) 133.63,75.232 133.719,75.144 134.025,74.837 cw(c133.884,74.696) 134.025,74.554 cw(c133.884,74.696) 133.742,74.554 133.436,74.861 133.347,74.949 ccw(c133.206,74.808) 133.065,74.949 ccw(c133.206,74.808) 133.065,74.666 133.153,74.578 133.459,74.271 cw(c133.318,74.13) 133.459,73.989 cw(c133.318,74.13) 133.177,73.989 132.87,74.295 132.782,74.383 ccw(c132.64,74.242) 132.499,74.383 ccw(c132.64,74.242) 132.499,74.1 132.587,74.012 132.894,73.706 cw(c132.752,73.564) 132.894,73.423 cw(c132.752,73.564) 132.611,73.423 132.304,73.729 132.216,73.818 ccw(c132.075,73.676) 131.933,73.818 ccw(c132.075,73.676) 131.933,73.535 132.344,73.124 cw(c132.202,72.983) 132.344,72.842 cw(c132.202,72.983) 132.061,72.842 131.739,73.164 131.65,73.252 ccw(c131.509,73.11) 131.368,73.252 ccw(c131.509,73.11) 131.368,72.969 cw(c131.279,72.881) 131.368,72.793 131.05,72.475 131.05,71.325 132.747,69.628 v1(132.757,69.628)
FB_D5: U1.46 U2.76 | length 64.8
  Top Layer w0.2: U2.76@124.91,100.803 124.91,101.505 124.92,101.515 124.92,103.05 v1(125.525,103.655) ; U1.46@129.611,68.414 130.064,67.961 131.561,67.961 v1(131.9,68.3)
  Bottom Layer w0.2: v1(125.525,103.655) 131.101,103.655 135,99.756 135,85.058 133.625,83.683 133.625,76.075 133.128,75.578 cw(c132.987,75.72) 132.846,75.578 132.436,75.988 ccw(c132.295,75.846) 132.153,75.988 ccw(c132.295,75.846) 132.153,75.705 132.563,75.296 cw(c132.421,75.154) 132.563,75.013 cw(c132.421,75.154) 132.28,75.013 131.856,75.437 ccw(c131.714,75.296) 131.573,75.437 ccw(c131.714,75.296) 131.573,75.154 131.997,74.73 cw(c131.856,74.588) 131.997,74.447 cw(c131.856,74.588) 131.714,74.447 131.29,74.871 ccw(c131.149,74.73) 131.007,74.871 ccw(c131.149,74.73) 131.007,74.588 131.431,74.164 cw(c131.29,74.023) 131.431,73.881 cw(c131.29,74.023) 131.149,73.881 130.724,74.306 ccw(c130.583,74.164) 130.441,74.306 ccw(c130.583,74.164) 130.441,74.023 130.866,73.599 cw(c130.724,73.457) 130.866,73.316 cw(c130.724,73.457) 130.583,73.316 130.159,73.74 ccw(c130.017,73.599) 129.876,73.74 ccw(c130.017,73.599) 129.876,73.457 130.3,73.033 cw(c130.159,72.891) 130.3,72.75 130.025,72.475 130.025,71.425 130.35,71.1 ccw(c130.391,71.142) 130.433,71.1 cw(c130.575,70.959) 130.716,71.1 cw(c130.575,70.959) 130.716,70.818 129.967,70.069 ccw(c130.109,69.927) 129.967,69.786 ccw(c130.109,69.927) 130.25,69.786 130.957,70.493 130.995,70.531 cw(c131.137,70.39) 131.278,70.531 cw(c131.137,70.39) 131.278,70.248 131.24,70.21 130.533,69.503 ccw(c130.674,69.362) 130.533,69.22 ccw(c130.674,69.362) 130.816,69.22 131.483,69.887 cw(c131.523,69.848) 131.562,69.888 ; 131.563,69.887 132.2,69.25 132.2,68.45 131.975,68.225 v1(131.9,68.3)
FB_D6: U1.47 U2.72 | length 64.7
  Top Layer w0.2: U2.72@126.51,100.803 126.51,103.56 130.178,107.228 130.7,107.228 cw(c130.9,107.228) 130.9,107.428 cw(c130.9,107.228) 131.1,107.228 ccw(c131.3,107.228) 131.3,107.028 ccw(c131.3,107.228) 131.5,107.228 cw(c131.7,107.228) 131.7,107.428 cw(c131.7,107.228) 131.9,107.228 ccw(c132.1,107.228) 132.1,107.028 ccw(c132.1,107.228) 132.3,107.228 cw(c132.5,107.228) 132.5,107.428 cw(c132.5,107.228) 132.7,107.228 ccw(c132.9,107.228) 132.9,107.028 ccw(c132.9,107.228) 133.1,107.228 cw(c133.3,107.228) 133.3,107.428 cw(c133.3,107.228) 133.5,107.228 134.078,107.228 141.775,99.531 141.775,73.55 139.787,71.563 133.738,71.563 133.355,71.18 133.354,71.18 133.062,70.889 133.062,70.872 132.07,69.88 132.07,69.47 130.961,68.361 130.441,68.361 130.035,68.767 U1.47@129.965,68.767
FB_D7: U1.48 U2.71 | length 65.1
  Top Layer w0.2: U2.71@126.91,100.803 126.91,102.744 130.211,106.045 130.6,106.045 130.7,106.045 ccw(c130.7,106.145) 130.8,106.145 cw(c131,106.145) 131,106.345 cw(c131,106.145) 131.2,106.145 131.2,106.045 131.2,105.945 ccw(c131.4,105.945) 131.4,105.745 ccw(c131.4,105.945) 131.6,105.945 131.6,106.045 131.6,106.145 cw(c131.8,106.145) 131.8,106.345 cw(c131.8,106.145) 132,106.145 132,106.045 132,105.945 ccw(c132.2,105.945) 132.2,105.745 ccw(c132.2,105.945) 132.4,105.945 132.4,106.045 132.4,106.145 cw(c132.6,106.145) 132.6,106.345 cw(c132.6,106.145) 132.8,106.145 132.8,106.045 132.8,105.945 ccw(c133,105.945) 133,105.745 ccw(c133,105.945) 133.2,105.945 133.2,106.045 133.2,106.145 cw(c133.4,106.145) 133.4,106.345 cw(c133.4,106.145) 133.6,106.145 133.6,106.045 133.6,105.945 ccw(c133.8,105.945) 133.8,105.745 ccw(c133.8,105.945) 134,105.945 cw(c134.1,105.945) 134.1,106.045 134.4,106.045 134.695,106.045 ; U1.48@130.318,69.121 130.736,69.539 130.807,69.61 ccw(c130.736,69.68) 130.807,69.751 cw(c130.948,69.892) 130.807,70.034 cw(c130.948,69.892) 131.09,70.034 131.16,69.963 131.231,69.892 ccw(c131.373,70.034) 131.514,69.892 ccw(c131.373,70.034) 131.514,70.175 131.443,70.246 131.373,70.317 cw(c131.514,70.458) 131.373,70.6 cw(c131.514,70.458) 131.655,70.6 131.726,70.529 131.79,70.465 ccw(c131.931,70.606) 132.073,70.465 ccw(c131.931,70.606) 132.073,70.748 132.009,70.812 131.938,70.882 cw(c132.08,71.024) 131.938,71.165 cw(c132.08,71.024) 132.221,71.165 132.292,71.094 132.356,71.031 ccw(c132.497,71.172) 132.639,71.031 ccw(c132.497,71.172) 132.639,71.313 132.599,71.353 cw(c132.623,71.377) 132.599,71.401 133.272,72.075 133.442,72.075 133.452,72.065 139.615,72.065 141.375,73.825 141.375,99.366 134.695,106.045 ; 134.5,106.045 134.695,106.045
FB_D8: U1.3 U2.70 | length 65.1
  Top Layer w0.2: U2.70@127.31,100.803 127.31,102.491 129.594,104.775 130.025,104.775 ccw(c130.025,104.975) 130.225,104.975 cw(c130.425,104.975) 130.425,105.175 cw(c130.425,104.975) 130.625,104.975 130.625,104.775 ccw(c130.775,104.775) 130.775,104.625 130.875,104.625 ccw(c130.875,104.775) 131.025,104.775 131.025,104.975 cw(c131.225,104.975) 131.225,105.175 cw(c131.225,104.975) 131.425,104.975 131.425,104.775 ccw(c131.575,104.775) 131.575,104.625 131.675,104.625 ccw(c131.675,104.775) 131.825,104.775 131.825,104.975 cw(c132.025,104.975) 132.025,105.175 cw(c132.025,104.975) 132.225,104.975 132.225,104.775 ccw(c132.375,104.775) 132.375,104.625 132.475,104.625 ccw(c132.475,104.775) 132.625,104.775 132.625,104.975 cw(c132.825,104.975) 132.825,105.175 cw(c132.825,104.975) 133.025,104.975 133.025,104.775 ccw(c133.175,104.775) 133.175,104.625 133.275,104.625 ccw(c133.275,104.775) 133.425,104.775 133.425,104.975 cw(c133.625,104.975) 133.625,105.175 cw(c133.625,104.975) 133.825,104.975 133.825,104.775 ccw(c133.975,104.775) 133.975,104.625 134.075,104.625 ccw(c134.075,104.775) 134.225,104.775 134.425,104.775 135.4,104.775 140.975,99.2 140.975,74.4 140.95,74.375 140.714,74.139 140.431,73.856 cw(c140.29,73.715) 140.149,73.574 ccw(c140.007,73.432) 139.866,73.291 cw(c139.724,73.149) 139.583,73.008 139.3,72.725 139.05,72.475 138.325,72.475 138.125,72.475 cw(c138.125,72.575) 138.025,72.575 ccw(c137.825,72.575) 137.825,72.775 ccw(c137.825,72.575) 137.625,72.575 cw(c137.525,72.575) 137.525,72.475 137.325,72.475 cw(c137.325,72.575) 137.225,72.575 ccw(c137.025,72.575) 137.025,72.775 ccw(c137.025,72.575) 136.825,72.575 cw(c136.725,72.575) 136.725,72.475 136.525,72.475 cw(c136.525,72.575) 136.425,72.575 ccw(c136.225,72.575) 136.225,72.775 ccw(c136.225,72.575) 136.025,72.575 cw(c135.925,72.575) 135.925,72.475 135.725,72.475 cw(c135.725,72.575) 135.625,72.575 ccw(c135.425,72.575) 135.425,72.775 ccw(c135.425,72.575) 135.225,72.575 cw(c135.125,72.575) 135.125,72.475 134.925,72.475 cw(c134.925,72.575) 134.825,72.575 ccw(c134.625,72.575) 134.625,72.775 ccw(c134.625,72.575) 134.425,72.575 cw(c134.325,72.575) 134.325,72.475 134.125,72.475 cw(c134.125,72.575) 134.025,72.575 ccw(c133.825,72.575) 133.825,72.775 ccw(c133.825,72.575) 133.625,72.575 133.625,72.525 cw(c133.575,72.525) 133.575,72.475 133,72.475 ccw(c133,72.275) 132.8,72.275 132.8,72.251 cw(c132.6,72.251) 132.6,72.051 cw(c132.6,72.251) 132.4,72.251 132.4,72.475 132.4,72.775 ccw(c132.2,72.775) 132.2,72.975 ccw(c132.2,72.775) 132,72.775 132,72.475 132,72.175 cw(c131.8,72.175) 131.8,71.975 cw(c131.8,72.175) 131.6,72.175 131.6,72.275 ccw(c131.4,72.275) 131.4,72.475 131.2,72.475 130.95,72.475 ; U1.3@129.611,71.136 130.95,72.475 ; 131.075,72.475 130.95,72.475
FB_D9: U1.4 U2.69 | length 70
  Top Layer w0.2: U2.69@127.71,100.803 127.71,102.326 129.109,103.725 129.55,103.725 ccw(c129.55,103.925) 129.75,103.925 129.75,104.025 cw(c129.95,104.025) 129.95,104.225 cw(c129.95,104.025) 130.15,104.025 130.15,103.925 ccw(c130.35,103.925) 130.35,103.725 ccw(c130.35,103.925) 130.55,103.925 130.55,104.025 cw(c130.75,104.025) 130.75,104.225 cw(c130.75,104.025) 130.95,104.025 130.95,103.925 ccw(c131.15,103.925) 131.15,103.725 ccw(c131.15,103.925) 131.35,103.925 131.35,104.025 cw(c131.55,104.025) 131.55,104.225 cw(c131.55,104.025) 131.75,104.025 131.75,103.925 ccw(c131.95,103.925) 131.95,103.725 ccw(c131.95,103.925) 132.15,103.925 132.15,104.025 cw(c132.35,104.025) 132.35,104.225 cw(c132.35,104.025) 132.55,104.025 132.55,103.925 ccw(c132.75,103.925) 132.75,103.725 ccw(c132.75,103.925) 132.95,103.925 132.95,104.025 cw(c133.15,104.025) 133.15,104.225 cw(c133.15,104.025) 133.35,104.025 133.35,103.925 ccw(c133.55,103.925) 133.55,103.725 ccw(c133.55,103.925) 133.75,103.925 133.75,104.025 cw(c133.95,104.025) 133.95,104.225 cw(c133.95,104.025) 134.15,104.025 134.15,103.925 ccw(c134.35,103.925) 134.35,103.725 ccw(c134.35,103.925) 134.55,103.925 134.55,104.025 cw(c134.75,104.025) 134.75,104.225 cw(c134.75,104.025) 134.95,104.025 134.95,103.925 ccw(c135.15,103.925) 135.15,103.725 135.225,103.725 135.825,103.725 140.525,99.025 140.525,75.05 139.675,74.2 139.05,73.575 ; 130.721,72.954 U1.4@129.258,71.49 ; 130.863,73.095 U1.4@129.258,71.49 ; 139.191,73.716 139.05,73.575 ; 139.474,73.999 139.05,73.575 ; U1.4@129.258,71.49 131.146,73.378 131.343,73.575 131.543,73.575 131.843,73.575 ccw(c131.843,73.675) 131.943,73.675 cw(c132.143,73.675) 132.143,73.875 cw(c132.143,73.675) 132.343,73.675 132.343,73.575 132.343,73.498 ccw(c132.543,73.498) 132.543,73.298 ccw(c132.543,73.498) 132.743,73.498 132.743,73.575 132.743,73.675 cw(c132.943,73.675) 132.943,73.875 cw(c132.943,73.675) 133.143,73.675 133.143,73.575 133.143,73.475 ccw(c133.343,73.475) 133.343,73.275 ccw(c133.343,73.475) 133.543,73.475 133.543,73.575 133.543,73.675 cw(c133.743,73.675) 133.743,73.875 cw(c133.743,73.675) 133.943,73.675 133.943,73.575 133.943,73.475 ccw(c134.143,73.475) 134.143,73.275 ccw(c134.143,73.475) 134.343,73.475 134.343,73.575 134.343,73.675 cw(c134.543,73.675) 134.543,73.875 cw(c134.543,73.675) 134.743,73.675 134.743,73.575 134.743,73.475 ccw(c134.943,73.475) 134.943,73.275 ccw(c134.943,73.475) 135.143,73.475 135.143,73.575 135.143,73.675 cw(c135.343,73.675) 135.343,73.875 cw(c135.343,73.675) 135.543,73.675 135.543,73.575 135.543,73.475 ccw(c135.743,73.475) 135.743,73.275 ccw(c135.743,73.475) 135.943,73.475 135.943,73.575 135.943,73.675 cw(c136.143,73.675) 136.143,73.875 cw(c136.143,73.675) 136.343,73.675 136.343,73.575 136.343,73.475 ccw(c136.543,73.475) 136.543,73.275 ccw(c136.543,73.475) 136.743,73.475 136.743,73.575 136.743,73.675 cw(c136.943,73.675) 136.943,73.875 cw(c136.943,73.675) 137.143,73.675 137.143,73.575 137.143,73.475 ccw(c137.343,73.475) 137.343,73.275 ccw(c137.343,73.475) 137.543,73.475 137.543,73.575 137.543,73.675 cw(c137.743,73.675) 137.743,73.875 cw(c137.743,73.675) 137.943,73.675 137.943,73.575 137.943,73.475 ccw(c138.143,73.475) 138.143,73.275 ccw(c138.143,73.475) 138.343,73.475 cw(c138.443,73.475) 138.443,73.575 138.743,73.575 139.05,73.575
FB_D10: U1.5 U2.68 | length 64.5
  Top Layer w0.2: U2.68@128.11,100.803 128.11,102.16 128.825,102.875 129.075,102.875 ccw(c129.075,103.075) 129.275,103.075 cw(c129.475,103.075) 129.475,103.275 cw(c129.475,103.075) 129.675,103.075 ccw(c129.875,103.075) 129.875,102.875 ccw(c129.875,103.075) 130.075,103.075 cw(c130.275,103.075) 130.275,103.275 cw(c130.275,103.075) 130.475,103.075 ccw(c130.675,103.075) 130.675,102.875 ccw(c130.675,103.075) 130.875,103.075 cw(c131.075,103.075) 131.075,103.275 cw(c131.075,103.075) 131.275,103.075 ccw(c131.475,103.075) 131.475,102.875 ccw(c131.475,103.075) 131.675,103.075 cw(c131.875,103.075) 131.875,103.275 cw(c131.875,103.075) 132.075,103.075 ccw(c132.275,103.075) 132.275,102.875 ccw(c132.275,103.075) 132.475,103.075 cw(c132.675,103.075) 132.675,103.275 cw(c132.675,103.075) 132.875,103.075 ccw(c133.075,103.075) 133.075,102.875 ccw(c133.075,103.075) 133.275,103.075 cw(c133.475,103.075) 133.475,103.275 cw(c133.475,103.075) 133.675,103.075 ccw(c133.875,103.075) 133.875,102.875 ccw(c133.875,103.075) 134.075,103.075 cw(c134.275,103.075) 134.275,103.275 cw(c134.275,103.075) 134.475,103.075 ccw(c134.675,103.075) 134.675,102.875 ccw(c134.675,103.075) 134.875,103.075 cw(c135.075,103.075) 135.075,103.275 cw(c135.075,103.075) 135.275,103.075 135.275,102.875 ccw(c135.45,102.875) 135.45,102.7 135.5,102.7 ccw(c135.5,102.875) 135.675,102.875 136,102.875 136.075,102.875 139.975,98.975 139.975,76.325 139.975,76.125 139.93,76.08 139.789,75.939 ccw(c139.93,75.797) 139.789,75.656 cw(c139.647,75.514) 139.789,75.373 cw(c139.647,75.514) 139.506,75.373 139.364,75.514 139.223,75.656 ccw(c139.081,75.514) 138.94,75.656 ccw(c139.081,75.514) 138.94,75.373 cw(c138.799,75.231) 138.94,75.09 138.799,74.949 138.657,74.807 138.35,74.807 138.15,74.807 ccw(c138.15,74.607) 137.95,74.607 cw(c137.75,74.607) 137.75,74.407 cw(c137.75,74.607) 137.55,74.607 137.55,74.807 137.55,75.007 ccw(c137.35,75.007) 137.35,75.207 ccw(c137.35,75.007) 137.15,75.007 137.15,74.807 137.15,74.607 cw(c136.95,74.607) 136.95,74.407 cw(c136.95,74.607) 136.75,74.607 136.75,74.807 136.75,75.007 ccw(c136.55,75.007) 136.55,75.207 ccw(c136.55,75.007) 136.35,75.007 136.35,74.807 136.35,74.607 cw(c136.15,74.607) 136.15,74.407 cw(c136.15,74.607) 135.95,74.607 135.95,74.807 135.95,75.007 ccw(c135.75,75.007) 135.75,75.207 ccw(c135.75,75.007) 135.55,75.007 135.55,74.807 135.55,74.607 cw(c135.35,74.607) 135.35,74.407 cw(c135.35,74.607) 135.15,74.607 135.15,74.807 135.15,75.007 ccw(c134.95,75.007) 134.95,75.207 ccw(c134.95,75.007) 134.75,75.007 134.75,74.807 134.75,74.607 cw(c134.55,74.607) 134.55,74.407 cw(c134.55,74.607) 134.35,74.607 134.35,74.807 134.35,75.007 ccw(c134.15,75.007) 134.15,75.207 ccw(c134.15,75.007) 133.95,75.007 133.95,74.807 133.95,74.607 cw(c133.75,74.607) 133.75,74.407 cw(c133.75,74.607) 133.55,74.607 133.55,74.807 133.55,75.007 ccw(c133.35,75.007) 133.35,75.207 ccw(c133.35,75.007) 133.15,75.007 133.15,74.807 133.15,74.607 cw(c132.95,74.607) 132.95,74.407 cw(c132.95,74.607) 132.75,74.607 132.75,74.807 132.75,75.007 ccw(c132.55,75.007) 132.55,75.207 ccw(c132.55,75.007) 132.35,75.007 cw(c132.15,75.007) 132.15,74.807 131.868,74.807 U1.5@128.904,71.843